# Altium PCB PCB1.PcbDoc (part 2 of 3)
Units mil, origin at the board's own origin, x right, y up, seen from the top; angles counter-clockwise.
Board outline 3930 x 3600 mil, 2 copper layers (Top Layer, Bottom Layer), stack 65.792 mil thick; 169 components, 135 nets, 555 pads, 164 vias.
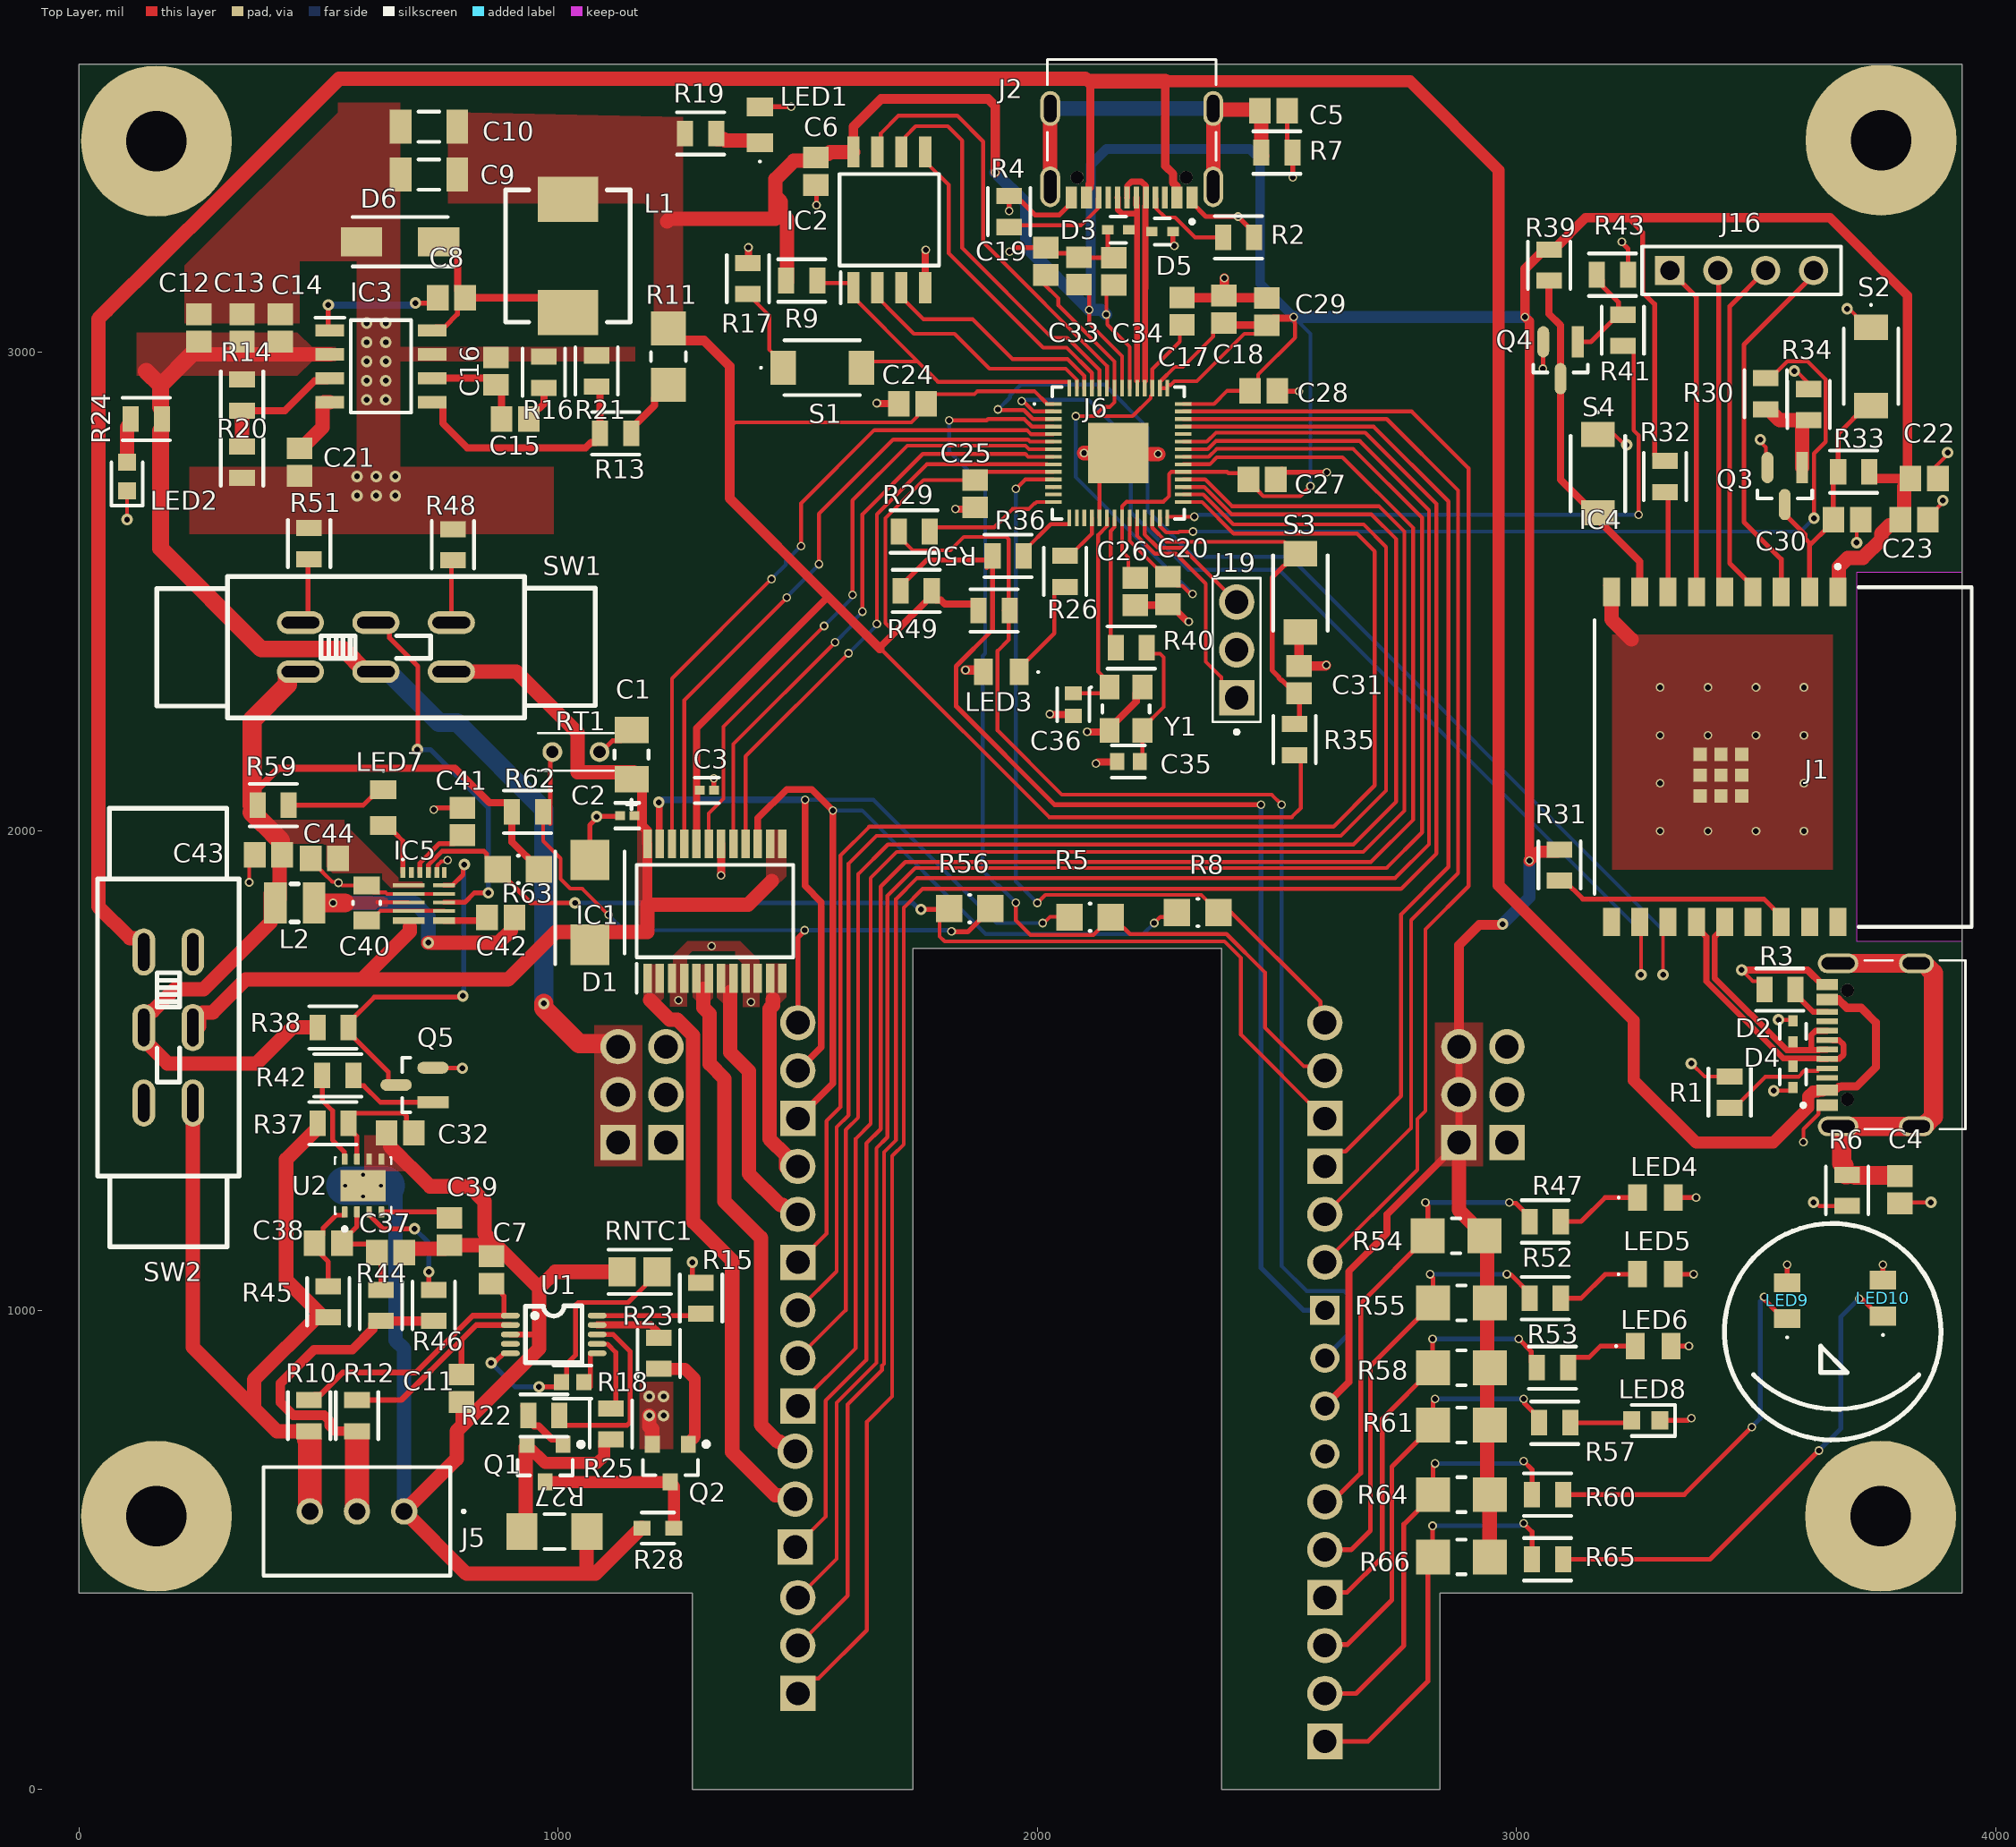
[diagram p0: Top Layer view]

## Via types
v1: diameter 18, hole 12, Top Layer to Bottom Layer, 108 vias
v2: diameter 24, hole 12, Top Layer to Bottom Layer, 56 vias

## Nets (pads, with @x,y where several pads share a name; then routed paths per layer and width w, separated by ;. In a path a pad name is that pad's centre, name@x,y a point inside that pad or via, vN(x,y) a via of type N, cw(c..) or ccw(c..) an arc to the next point about the centre after c; other vN are vias at no path point) (continued)
Bat+: (continued)
  Top Layer w30: SW2.2@250,1592.52 250,1613.44 257.97,1621.41 278.89,1621.41 347.48,1690 590,1690 ; 690,1800 690,1790 590,1690 ; SW1.6@776.96,2332.64 912.61,2332.64 1040,2205.25 1040,2122.82 C1.2@1157.44,2122.82 ; 1445.43,1895.43 1396,1846 1186.25,1846 1186.25,1789 1080,1789 994.25,1789 895.25,1690 590,1690
Bat+_Preswitch: J5.3 R10.1 R37.1 R45.1 SW2.3 | length 1684.1
  Top Layer w30: SW2.3@237.36,1432.52 237.36,922.64 365,795 ; R10.1@480,747.5 412.5,747.5 365,795 ; R37.1@497.5,1390 497.5,1380.14 432,1314.64 432,1063.14 502.57,992.57 365,855 365,795
  Top Layer w50: 480,730 481.57,728.43 J5.3@481.57,580
Bat-: C7.2 C11.2 C32.2 C37.1 C39.2 J5.1 R27.1 R28.1 RNTC1.1 U1.3 U2.5 U2.6 U2.9 U2.10 U2.11 U2.12 U2.13 | length 3020.6
  Top Layer w10: 949.37,949.37 960,960 963.63,963.63
  Top Layer w12: U1.3@900,949.37 949.37,949.37
  Top Layer w30: C32.2@641.46,1370 649.09,1362.36 649.09,1341.95 732.64,1258.41 814.59,1258.41 846,1227 846,1160 870.54,1135.46 ; C37.1@679.61,1127.83 C39.2@763.22,1127.83 ; C39.2@773,1135.46 870.54,1135.46 ; C11.2@798,808.46 800.71,805.75 800.71,760.29 ; R27.1@1059,524.68 1059,450 ; RNTC1.1@1133.55,1080 994,1080 960,1046 ; R28.1@1174.54,545 1172.57,545 1089,461.43 1077.57,450 1059,450 ; 800.71,760.29 788,747.58 788,689.57 J5.1@678.43,580 808.43,450 1059,450 ; 800.71,760.29 960,919.58 960,949.37 960,960 960,1046 ; 870.54,1135.46 960,1046
  Bottom Layer w30: 660,1270 660,937.61 678.43,919.19 J5.1@678.43,580
  Bottom Layer w80: U2.10@555.2,1260 640,1260